# Altium PCB PCB1.PcbDoc (part 1 of 2)
Units mm, origin at the board's own origin, x right, y up, seen from the top; angles counter-clockwise.
Board outline 71.07 x 44.83 mm, 4 copper layers (Top Layer, Layer 1, Layer 2, Bottom Layer), stack 0.584 mm thick; 134 components, 68 nets, 384 pads, 224 vias.
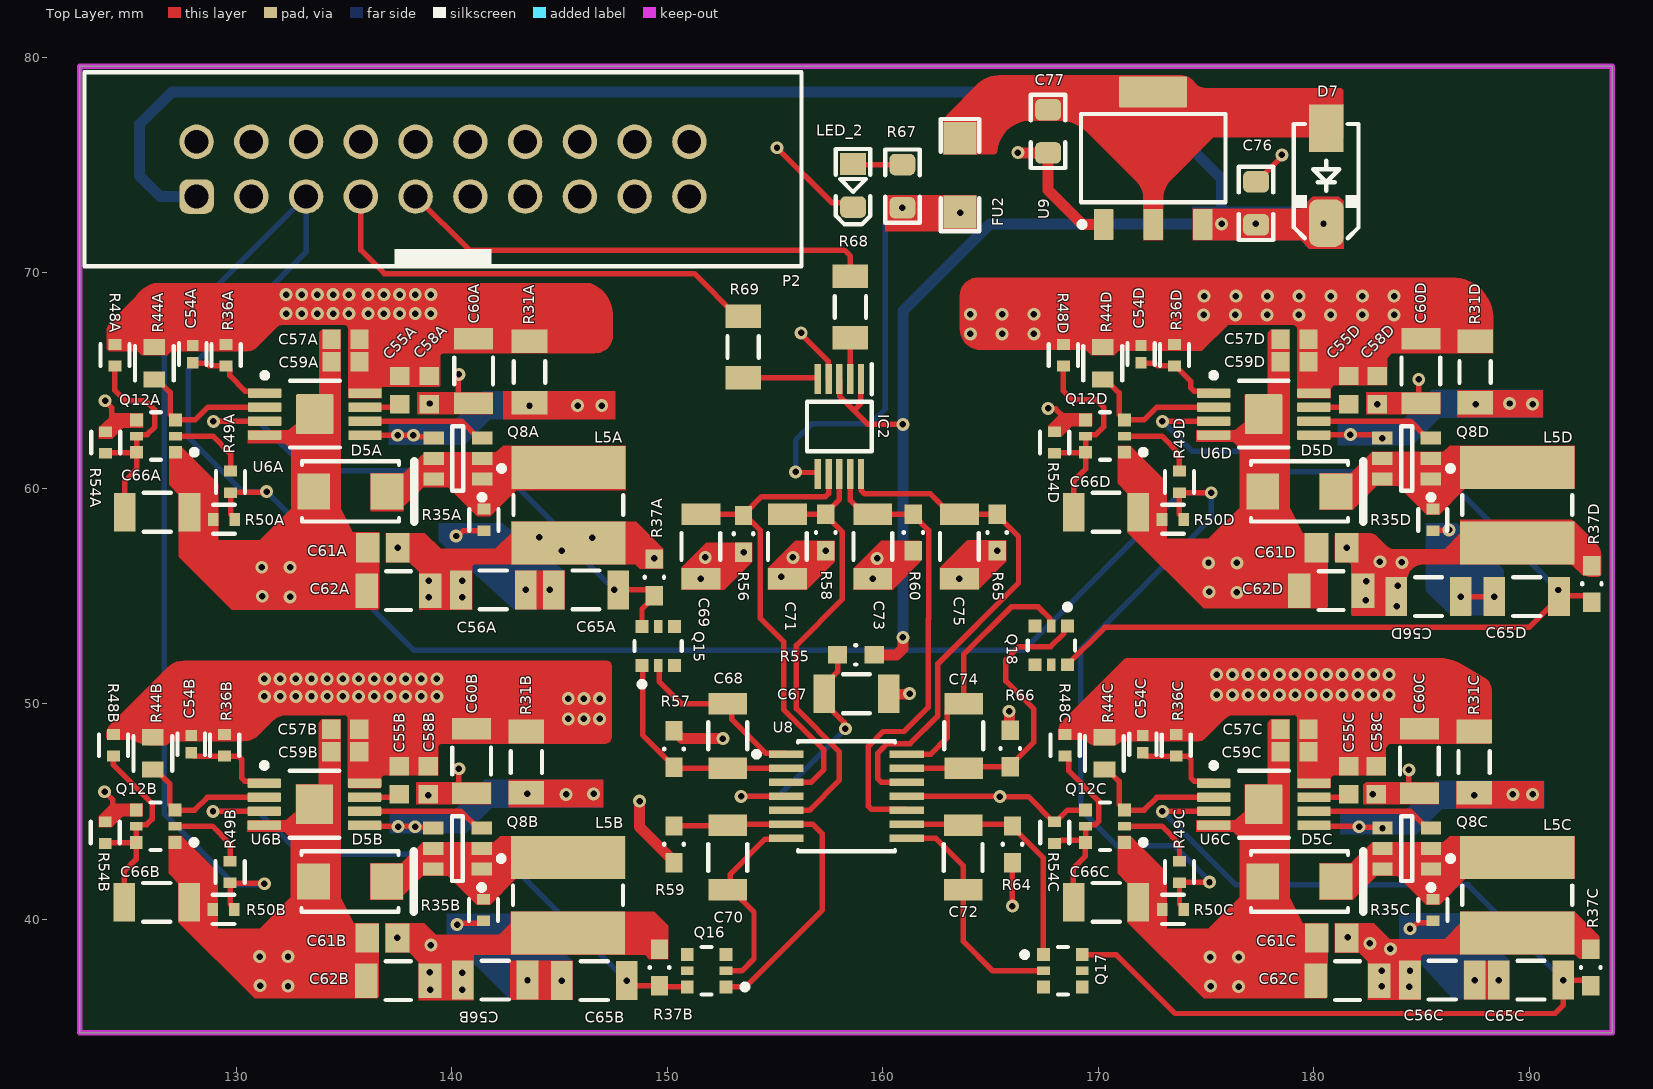
[diagram p0: Top Layer view]
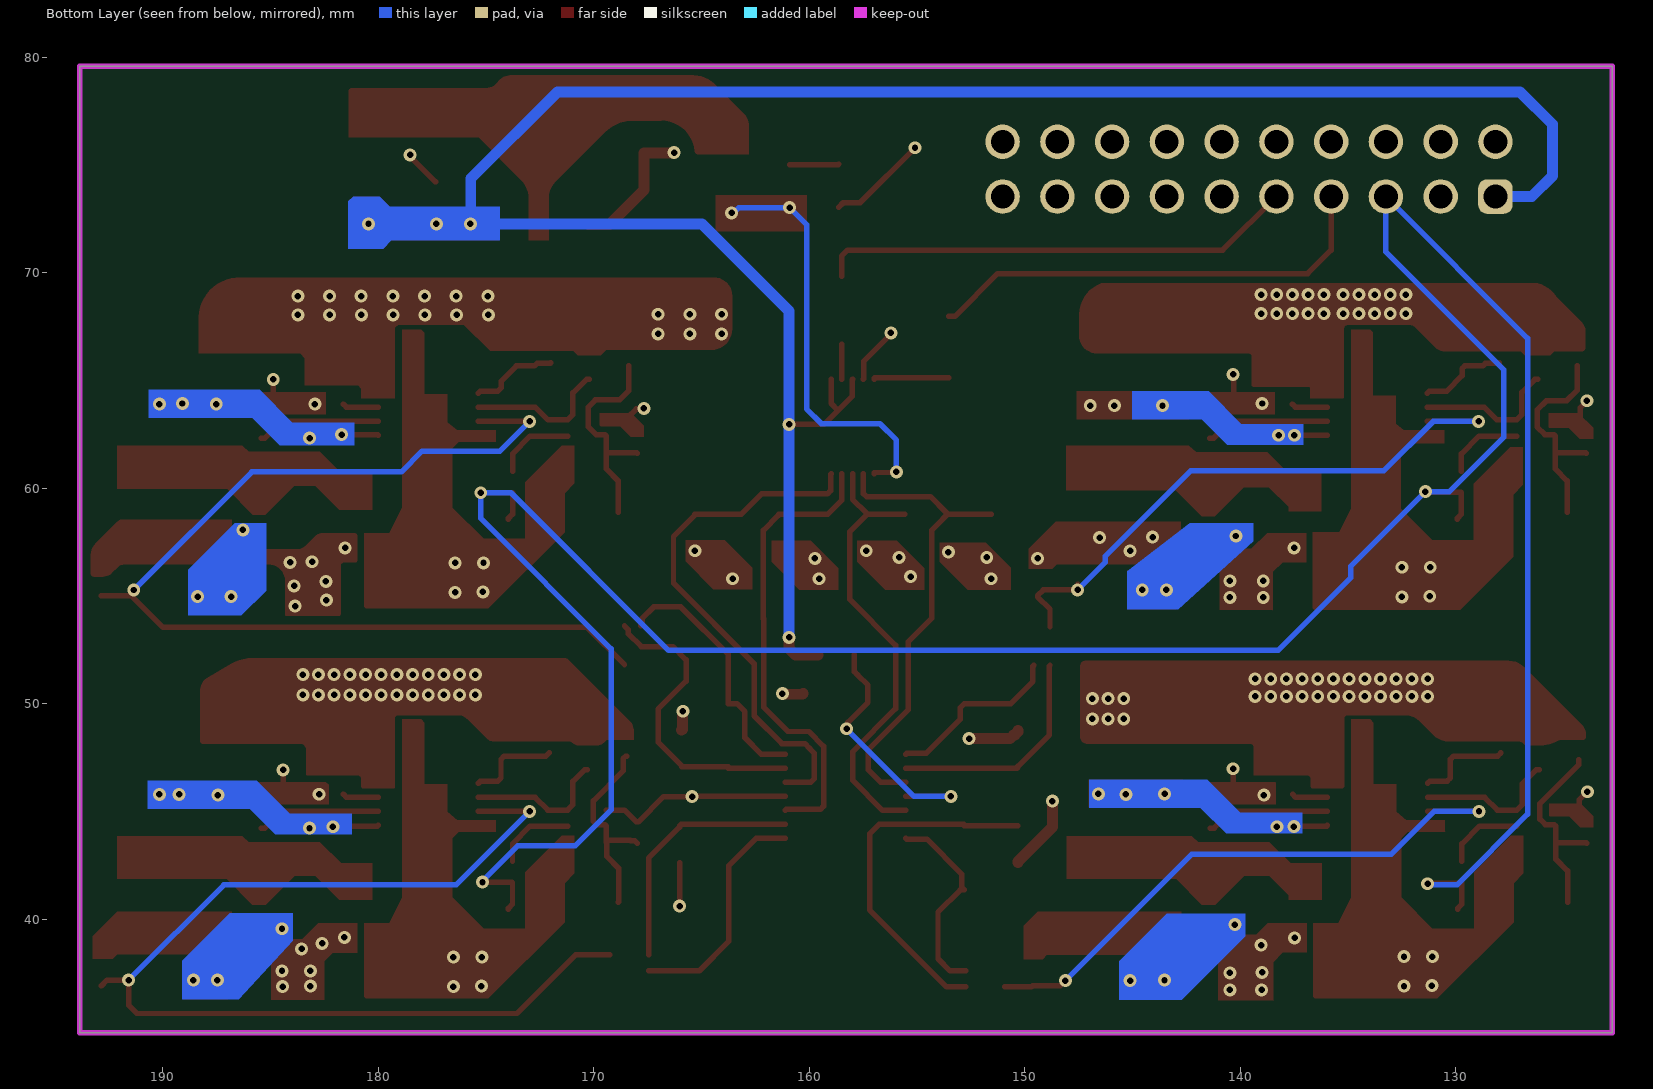
[diagram p1: Bottom Layer view, seen from below]
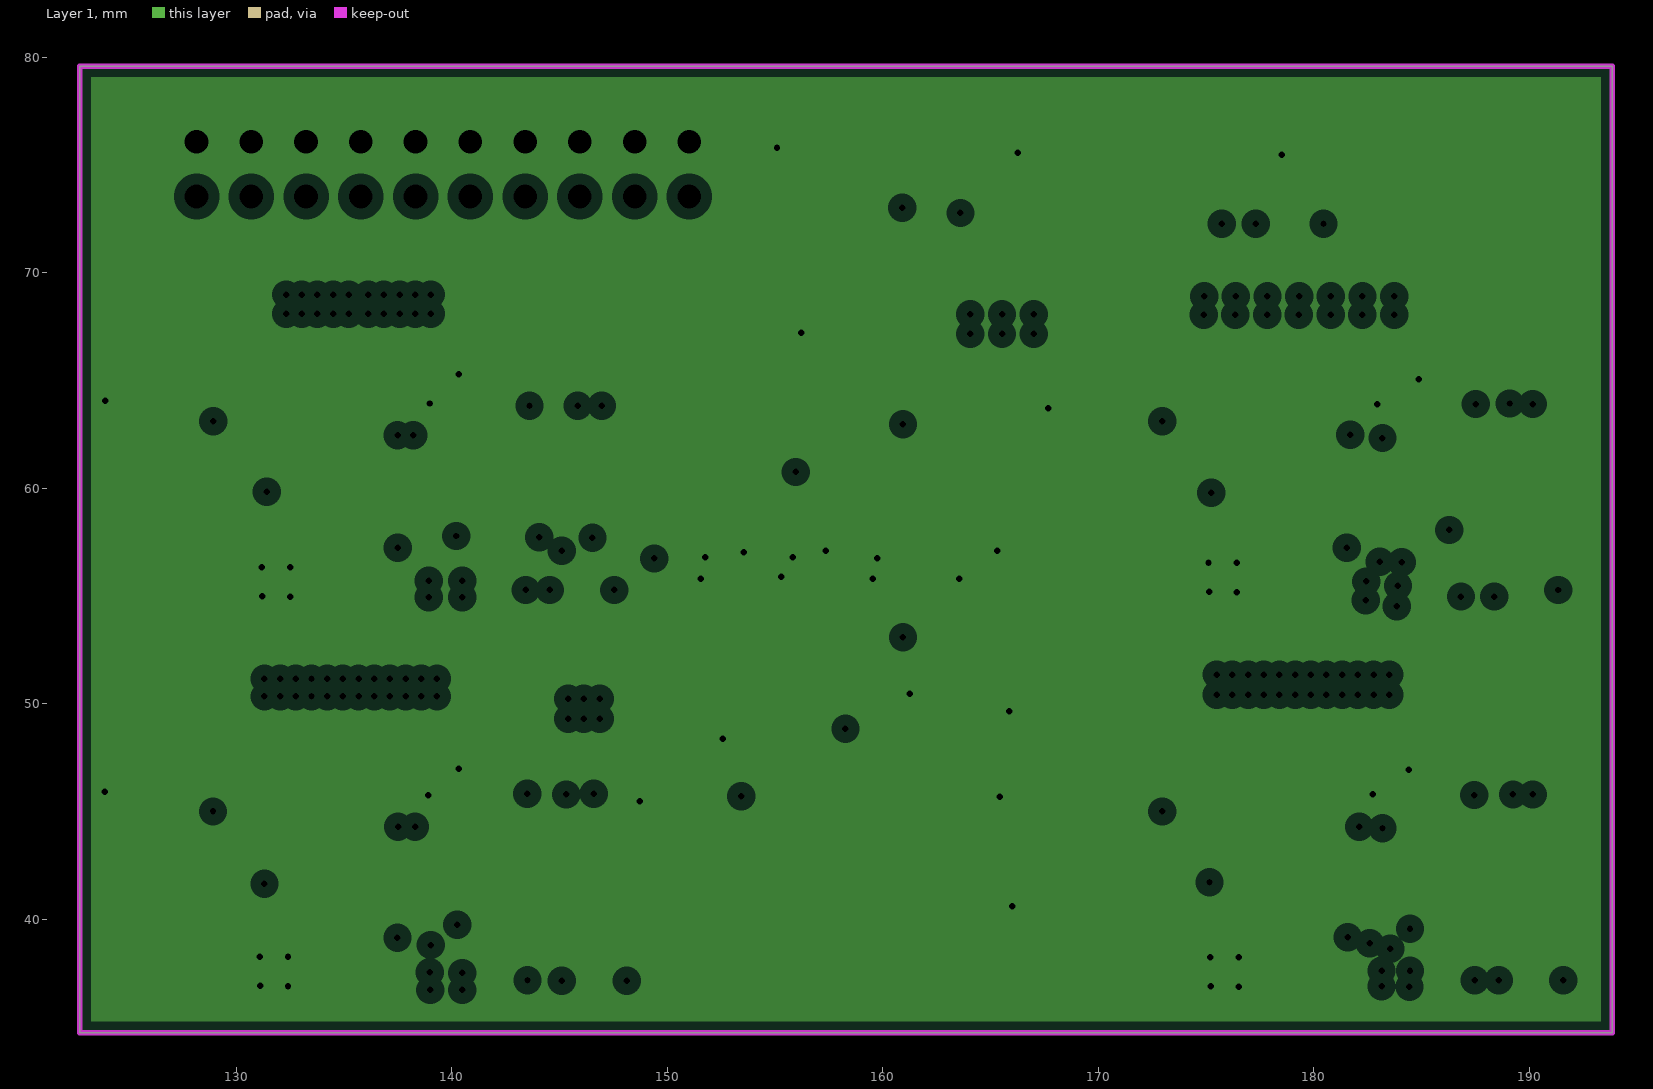
[diagram p2: Layer 1, clearances drawn from the general rule]
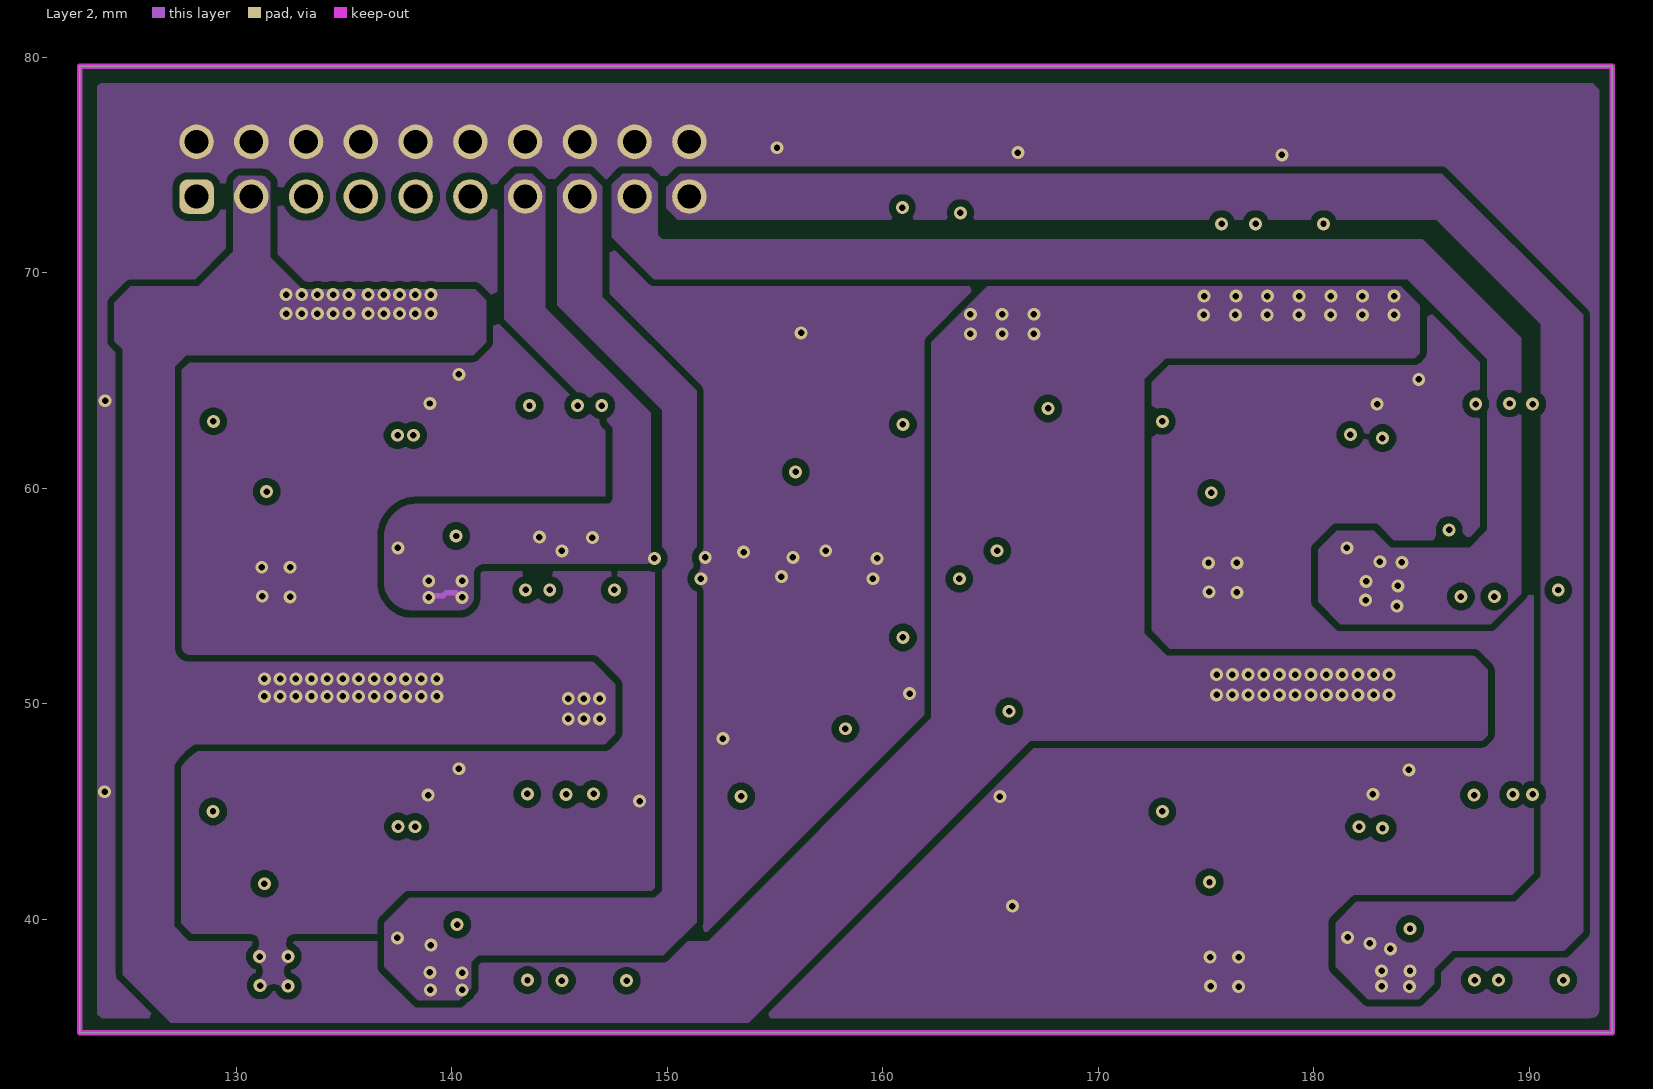
[diagram p3: Layer 2]
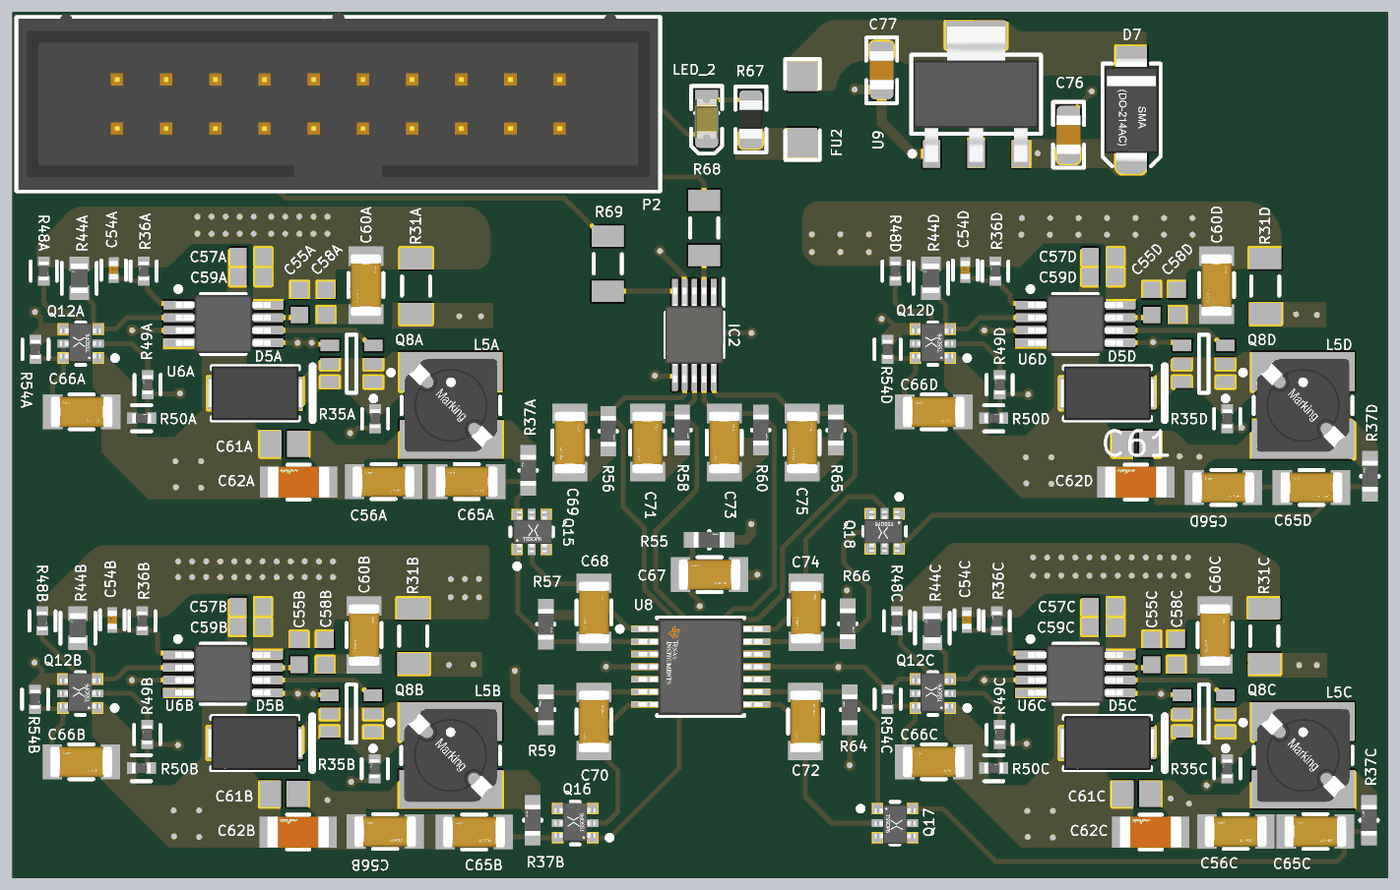
[diagram p5: 3D render of the assembled board from above, using the file's embedded part models]

## Layer stack, top to bottom
Top Solder: solder mask 0.0102, Solder Resist, Dk 3.5
Top Layer: signal copper 0.043
Dielectric 2: prepreg 0.0711, PP-006, Dk 4.1
Layer 1: plane copper 0.018, net GND
Dielectric 1: core 0.32, FR-4, Dk 4.8
Layer 2: signal copper 0.018
Dielectric 3: prepreg 0.0711, PP-006, Dk 4.1
Bottom Layer: signal copper 0.043
Bottom Solder: solder mask 0.0102, Solder Resist, Dk 3.5

## Board outline
122.758,34.747 122.758,79.578 193.827,79.578 193.827,34.747

## Design rules (kind name [scope] priority, off if disabled: settings)
AssemblyTestPointUsage [All] p1 off:
AssemblyTestpoint [All] p1 off: testpointundercomponent=FALSE minsize=1.016 maxsize=2.54 preferedsize=1.524 minholesize=0 maxholesize=1.016 preferedholesize=0.813 testpointgrid=0.025 usegrid=TRUE gridtolerance=0 allowsidetop=TRUE allowsidebottom=TRUE
Clearance Clearance_1 [All vs InPolygon] p1: gap=0.33 ignorepadtopadclearanceinfootprint=FALSE except(0: Arc-Hole Track-Hole SMDPad-Hole THPad-Hole Via-Hole Fill-Hole Poly-Hole Region-Hole Text-Hole)
Clearance [All] p2: gap=0.178 ignorepadtopadclearanceinfootprint=FALSE except(0: Arc-Hole Track-Hole SMDPad-Hole THPad-Hole Via-Hole Fill-Hole Poly-Hole Region-Hole Text-Hole)
ComponentClearance [All] p1 off: gap=0.254 collisioncheckmode=3 verticalgap=0.254 showdistances=FALSE
FabricationTestPointUsage [All] p1 off: valid=0 allowmultiple=FALSE
FabricationTestpoint [All] p1 off: side=3 testpointundercomponent=FALSE minsize=1.016 maxsize=2.54 preferedsize=1.524 minholesize=0 maxholesize=1.016 preferedholesize=0.813 testpointgrid=0.025 allowsidetop=TRUE allowsidebottom=TRUE usegrid=TRUE gridtolerance=0
Height [All] p1 off: minheight=0 maxheight=25.4 prefheight=12.7
HoleSize [All] p1 off: absolutevalues=TRUE maxlimit=2.54 minlimit=0.025 maxpercent=80.000 minpercent=20.000
HoleToHoleClearance [All] p1 off: gap=0.254 allowstackedmicrovias=TRUE
LayerPairs [All] p1 off: enforce=TRUE
MinimumSolderMaskSliver [All] p1 off: minsoldermaskwidth=0.254
NetAntennae [All] p1 off: netantennaetolerance=0
PasteMaskExpansion [All] p1 off: expansion=0
PlaneClearance [All] p1: clearance=0.508
PlaneConnect [All] p1: planeconnectstyle=Direct reliefexpansion=0.508 reliefentries=4 reliefconductorwidth=0.254 reliefairgap=0.254
PolygonConnect [All] p1: connectstyle=Direct reliefconductorwidth=0.254 reliefentries=4 polygonreliefangle="90 Angle" airgapwidth=0.254
RoutingVias [All] p1: holewidth=0.4 width=0.8 viastyle="Through Hole" minholewidth=0.3 minwidth=0.6 maxholewidth=0.711 maxwidth=1.27
SilkToSilkClearance [All] p1 off: silktosilkclearance=0.254
SilkToSolderMaskClearance [IsPad] p1 off: minsilkscreentomaskgap=0.254 clearancetoexposedcopper=TRUE
SolderMaskExpansion [All] p1 off: expansion=0.102 istentingtop=FALSE
Width [All] p1: maxlimit=2.54 minlimit=0.254 preferedwidth=0.254
14 further rules are at their usual default settings.

## Classes and differential pairs
channel class SWReg: SWReg1 SWReg2 SWReg3 SWReg4
net class Vout[4..1]: Vout1 Vout2 Vout3 Vout4
net class FB_in[4..1]: FB_in1 FB_in2 FB_in3 FB_in4
component class U_clusterPlusOpamp: C67 C68 C69 C70 C71 C72 C73 C74 C75 Q15 Q16 Q17 Q18 R55 R56 R57 R58 R59 R60 R64 R65 R66 U8
component class SWReg4: C54D C55D C56D C57D C58D C59D C60D C61D C62D C65D C66D D5D L5D Q8D Q12D R31D R35D R36D R37D R44D R48D R49D R50D R54D U6D
component class SWReg3: C54C C55C C56C C57C C58C C59C C60C C61C C62C C65C C66C D5C L5C Q8C Q12C R31C R35C R36C R37C R44C R48C R49C R50C R54C U6C
component class SWReg2: C54B C55B C56B C57B C58B C59B C60B C61B C62B C65B C66B D5B L5B Q8B Q12B R31B R35B R36B R37B R44B R48B R49B R50B R54B U6B
component class SWReg1: C54A C55A C56A C57A C58A C59A C60A C61A C62A C65A C66A D5A L5A Q8A Q12A R31A R35A R36A R37A R44A R48A R49A R50A R54A U6A
component class AdjRegSection: C76 C77 D7 FU2 IC2 LED_2 P2 R67 R68 R69 U9

## Components (designator, comment, footprint, x,y, rotation, side; value= is the part's Value field where it differs from the comment)
C54A "100pF" FP-C0402-BB-MFG 127.991,66.223 r90 top value="10 pF" (schematic designator C54)
C54B "100pF" FP-C0402-BB-MFG 127.921,48.127 r90 top value="10 pF" (schematic designator C54)
C54C "100pF" FP-C0402-BB-MFG 172.061,48.127 r90 top value="10 pF" (schematic designator C54)
C54D "100pF" FP-C0402-BB-MFG 171.983,66.223 r90 top value="10 pF" (schematic designator C54)
C55A "470nF" CAPC1608X90X35LL15T15 137.592,64.554 r90 top (schematic designator C55)
C55B "470nF" CAPC1608X90X35LL15T15 137.573,46.458 r90 top (schematic designator C55)
C55C "470nF" CAPC1608X90X35LL15T15 181.611,46.458 r90 top (schematic designator C55)
C55D "470nF" CAPC1608X90X35LL15T15 181.61,64.554 r90 top (schematic designator C55)
C56A "10nF" FP-CC1206-1_25-MFG 141.935,55.283 r0 top value="100 nF" (schematic designator C56)
C56B "10nF" FP-CC1206-1_25-MFG 142.018,37.187 r0 top value="100 nF" (schematic designator C56)
C56C "10nF" FP-CC1206-1_25-MFG 185.955,37.187 r0 top value="100 nF" (schematic designator C56)
C56D "10nF" FP-CC1206-1_25-MFG 185.318,54.978 r0 top value="100 nF" (schematic designator C56)
C57A "1uF" CAPC1608X90X35LL15T15 135.077,66.916 r0 top (schematic designator C57)
C57B "1uF" CAPC1608X90X35LL15T15 135.059,48.82 r0 top (schematic designator C57)
C57C "1uF" CAPC1608X90X35LL15T15 179.097,48.82 r0 top (schematic designator C57)
C57D "1uF" CAPC1608X90X35LL15T15 179.095,66.916 r0 top (schematic designator C57)
C58A "100nF" CAPC1608X90X35LL15T15 138.964,64.554 r90 top (schematic designator C58)
C58B "100nF" CAPC1608X90X35LL15T15 138.919,46.458 r90 top (schematic designator C58)
C58C "100nF" CAPC1608X90X35LL15T15 182.881,46.458 r90 top (schematic designator C58)
C58D "100nF" CAPC1608X90X35LL15T15 182.93,64.554 r90 top (schematic designator C58)
C59A "1uF" CAPC1608X90X35LL15T15 135.077,65.874 r0 top (schematic designator C59)
C59B "1uF" CAPC1608X90X35LL15T15 135.059,47.779 r0 top (schematic designator C59)
C59C "1uF" CAPC1608X90X35LL15T15 179.097,47.779 r0 top (schematic designator C59)
C59D "1uF" CAPC1608X90X35LL15T15 179.095,65.874 r0 top (schematic designator C59)
C60A "10uF" FP-CC1206-1_25-MFG 141.021,65.443 r270 top value="100 nF" (schematic designator C60)
C60B "10uF" FP-CC1206-1_25-MFG 140.926,47.347 r270 top value="100 nF" (schematic designator C60)
C60C "10uF" FP-CC1206-1_25-MFG 184.888,47.347 r270 top value="100 nF" (schematic designator C60)
C60D "10uF" FP-CC1206-1_25-MFG 184.962,65.443 r270 top value="100 nF" (schematic designator C60)
C61A "1uF" CAPC2013X140X50LL20T25 136.805,57.238 r0 top (schematic designator C61)
C61B "1uF" CAPC2013X140X50LL20T25 136.786,39.143 r0 top (schematic designator C61)
C61C "1uF" CAPC2013X140X50LL20T25 180.824,39.143 r0 top (schematic designator C61)
C61D "1uF" CAPC2013X140X50LL20T25 180.822,57.238 r0 top (schematic designator C61)
C62A "10uF" FP-GRM31C-0_2-e0_3_0_8-MFG 137.541,55.257 r180 top (schematic designator C62)
C62B "10uF" FP-GRM31C-0_2-e0_3_0_8-MFG 137.522,37.161 r180 top (schematic designator C62)
C62C "10uF" FP-GRM31C-0_2-e0_3_0_8-MFG 181.561,37.161 r180 top (schematic designator C62)
C62D "10uF" FP-GRM31C-0_2-e0_3_0_8-MFG 180.797,55.257 r180 top (schematic designator C62)
C65A "100nF" FP-CC1206-1_25-MFG 146.228,55.283 r0 top value="100 nF" (schematic designator C65)
C65B "100nF" FP-CC1206-1_25-MFG 146.616,37.161 r0 top value="100 nF" (schematic designator C65)
C65C "100nF" FP-CC1206-1_25-MFG 190.07,37.187 r0 top value="100 nF" (schematic designator C65)
C65D "100nF" FP-CC1206-1_25-MFG 189.865,54.978 r0 top value="100 nF" (schematic designator C65)
C66A "10uF" FP-CC1206-1_25-MFG 126.34,58.889 r0 top value="100 nF" (schematic designator C66)
C66B "10uF" FP-CC1206-1_25-MFG 126.321,40.794 r0 top value="100 nF" (schematic designator C66)
C66C "10uF" FP-CC1206-1_25-MFG 170.359,40.794 r0 top value="100 nF" (schematic designator C66)
C66D "10uF" FP-CC1206-1_25-MFG 170.357,58.889 r0 top value="100 nF" (schematic designator C66)
C67 "100nF" FP-CC1206-1_25-MFG 158.775,50.47 r0 top value="100 nF"
C68 "1nF" FP-CC1206-1_25-MFG 152.806,48.514 r270 top value="100 nF"
C69 "1uF" FP-CC1206-1_25-MFG 151.562,57.302 r270 top value="100 nF"
C70 "1nF" FP-CC1206-1_25-MFG 152.806,42.875 r90 top value="100 nF"
C71 "1uF" FP-CC1206-1_25-MFG 155.575,57.302 r270 top value="100 nF"
C72 "1nF" FP-CC1206-1_25-MFG 163.728,42.875 r90 top value="100 nF"
C73 "1uF" FP-CC1206-1_25-MFG 159.537,57.302 r270 top value="100 nF"
C74 "1nF" FP-CC1206-1_25-MFG 163.754,48.514 r270 top value="100 nF"
C75 "1uF" FP-CC1206-1_25-MFG 163.551,57.302 r270 top value="100 nF"
C76 "Cap_El" 0805C 177.317,73.219 r90 top value=10uF
C77 "Cap_El" 0805C 167.665,76.556 r270 top value=10uF
D5A "VS-10MQ060NTRPBF" VISH-DO-214AC_V 135.308,59.855 r0 top (schematic designator D5)
D5B "VS-10MQ060NTRPBF" VISH-DO-214AC_V 135.289,41.759 r0 top (schematic designator D5)
D5C "VS-10MQ060NTRPBF" VISH-DO-214AC_V 179.327,41.759 r0 top (schematic designator D5)
D5D "VS-10MQ060NTRPBF" VISH-DO-214AC_V 179.325,59.855 r0 top (schematic designator D5)
D7 "1N4007" 430X270D 180.569,74.498 r270 top
FU2 "Fuse Thermal" 1206 163.576,74.524 r270 top
IC2 "MAX5841LEUB+" SOP50P490X110-10N 157.988,62.865 r270 top
L5A "74408943101" WE-SPC_4838 145.415,59.22 r0 top (schematic designator L5)
L5B "74408943101" WE-SPC_4838 145.396,41.124 r0 top (schematic designator L5)
L5C "74408943101" WE-SPC_4838 189.435,41.124 r0 top (schematic designator L5)
L5D "74408943101" WE-SPC_4838 189.433,59.22 r0 top (schematic designator L5)
LED_2 "power" 0805LED 158.623,74.041 r270 top
P2 "61202021621" 61202021621 139.598,74.803 r0 top
Q8A "NTGS5120PT1G" ONSC-TSOP-6-318G-02_V 140.284,61.379 r180 top (schematic designator Q8)
Q8B "NTGS5120PT1G" ONSC-TSOP-6-318G-02_V 140.266,43.283 r180 top (schematic designator Q8)
Q8C "NTGS5120PT1G" ONSC-TSOP-6-318G-02_V 184.304,43.283 r180 top (schematic designator Q8)
Q8D "NTGS5120PT1G" ONSC-TSOP-6-318G-02_V 184.302,61.379 r180 top (schematic designator Q8)
Q12A "BC846S,115" FP-SOT363-MFG 126.289,62.42 r180 top (schematic designator Q12)
Q12B "BC846S,115" FP-SOT363-MFG 126.27,44.324 r180 top (schematic designator Q12)
Q12C "BC846S,115" FP-SOT363-MFG 170.308,44.324 r180 top (schematic designator Q12)
Q12D "BC846S,115" FP-SOT363-MFG 170.307,62.42 r180 top (schematic designator Q12)
Q15 "BC846S,115" FP-SOT363-MFG 149.581,52.68 r90 top
Q16 "BC846S,115" FP-SOT363-MFG 151.83,37.617 r180 top
Q17 "BC846S,115" FP-SOT363-MFG 168.351,37.617 r0 top
Q18 "BC846S,115" FP-SOT363-MFG 167.818,52.715 r270 top
R31A "0R47" RESC3216X70X50NL05T20 143.612,65.392 r270 top (schematic designator R31)
R31B "0R47" RESC3216X70X50NL05T20 143.466,47.296 r270 top (schematic designator R31)
R31C "0R47" RESC3216X70X50NL05T20 187.428,47.296 r270 top (schematic designator R31)
R31D "0R47" RESC3216X70X50NL05T20 187.477,65.392 r270 top (schematic designator R31)
R35A "22K" FP-RC0402-0_4-MFG 141.497,58.533 r90 top (schematic designator R35)
R35B "22K" FP-RC0402-0_4-MFG 141.478,40.437 r90 top (schematic designator R35)
R35C "22K" FP-RC0402-0_4-MFG 185.516,40.437 r90 top (schematic designator R35)
R35D "22K" FP-RC0402-0_4-MFG 185.514,58.533 r90 top (schematic designator R35)
R36A "6K8R" FP-RC0402-0_4-MFG 129.54,66.173 r90 top (schematic designator R36)
R36B "6K8R" FP-RC0402-0_4-MFG 129.471,48.077 r90 top (schematic designator R36)
R36C "6K8R" FP-RC0402-0_4-MFG 173.61,48.077 r90 top (schematic designator R36)
R36D "6K8R" FP-RC0402-0_4-MFG 173.532,66.173 r90 top (schematic designator R36)
R37A "33K" FP-RC0603-0_55-MFG 149.403,55.867 r90 top (schematic designator R37)
R37B "33K" FP-RC0603-0_55-MFG 149.638,37.771 r90 top (schematic designator R37)
R37C "33K" FP-RC0603-0_55-MFG 192.838,37.771 r90 top (schematic designator R37)
R37D "33K" FP-RC0603-0_55-MFG 192.887,55.562 r90 top (schematic designator R37)
R44A "240K" FP-CRCW0603-e3-MFG 126.213,65.798 r90 top (schematic designator R44)
R44B "240K" FP-CRCW0603-e3-MFG 126.143,47.702 r90 top (schematic designator R44)
R44C "240K" FP-CRCW0603-e3-MFG 170.283,47.702 r90 top (schematic designator R44)
R44D "240K" FP-CRCW0603-e3-MFG 170.205,65.798 r90 top (schematic designator R44)
R48A "100KR" FP-RC0402-0_4-MFG 124.384,66.173 r270 top (schematic designator R48)
R48B "100KR" FP-RC0402-0_4-MFG 124.314,48.077 r270 top (schematic designator R48)
R48C "100KR" FP-RC0402-0_4-MFG 168.454,48.077 r270 top (schematic designator R48)
R48D "100KR" FP-RC0402-0_4-MFG 168.376,66.173 r270 top (schematic designator R48)
R49A "4K7R" FP-RC0402-0_4-MFG 129.743,60.294 r90 top (schematic designator R49)
R49B "4K7R" FP-RC0402-0_4-MFG 129.725,42.199 r90 top (schematic designator R49)
R49C "4K7R" FP-RC0402-0_4-MFG 173.763,42.199 r90 top (schematic designator R49)
R49D "4K7R" FP-RC0402-0_4-MFG 173.761,60.294 r90 top (schematic designator R49)
R50A "2k2R" FP-RC0402-0_4-MFG 129.439,58.559 r0 top (schematic designator R50)
R50B "2k2R" FP-RC0402-0_4-MFG 129.42,40.463 r0 top (schematic designator R50)
R50C "2k2R" FP-RC0402-0_4-MFG 173.458,40.463 r0 top (schematic designator R50)
R50D "2k2R" FP-RC0402-0_4-MFG 173.456,58.559 r0 top (schematic designator R50)
R54A "10KR" FP-RC0402-0_4-MFG 123.952,62.123 r270 top (schematic designator R54)
R54B "10KR" FP-RC0402-0_4-MFG 123.933,44.027 r270 top (schematic designator R54)
R54C "10KR" FP-RC0402-0_4-MFG 167.972,44.027 r270 top (schematic designator R54)
R54D "10KR" FP-RC0402-0_4-MFG 167.97,62.123 r270 top (schematic designator R54)
R55 "33R" FP-RC0603-0_55-MFG 158.75,52.273 r0 top
R56 "33R" FP-RC0603-0_55-MFG 153.543,57.887 r270 top
R57 "1KR" FP-RC0603-0_55-MFG 150.317,47.904 r270 top
R58 "33R" FP-RC0603-0_55-MFG 157.353,57.95 r270 top
R59 "1KR" FP-RC0603-0_55-MFG 150.317,43.485 r90 top
R60 "33R" FP-RC0603-0_55-MFG 161.417,57.95 r270 top
R64 "1KR" FP-RC0603-0_55-MFG 166.014,43.485 r90 top
R65 "33R" FP-RC0603-0_55-MFG 165.303,57.95 r270 top
R66 "1KR" FP-RC0603-0_55-MFG 165.913,47.93 r270 top
R67 "Res1" 0805L 160.909,74.016 r90 top value=330
R68 "330" RESC3216X70X50NL05T20 158.496,68.405 r90 top
R69 "330" RESC3216X70X50NL05T20 153.518,66.548 r90 top
U6A "LM25085AMY/NOPB" DGN0008A_M 133.655,63.437 r0 top (schematic designator U6)
U6B "LM25085AMY/NOPB" DGN0008A_M 133.636,45.342 r0 top (schematic designator U6)
U6C "LM25085AMY/NOPB" DGN0008A_M 177.674,45.342 r0 top (schematic designator U6)
U6D "LM25085AMY/NOPB" DGN0008A_M 177.673,63.437 r0 top (schematic designator U6)
U8 "LM324PWR" FP-PW0014A-MFG 158.312,45.71 r0 top
U9 "LM1117MPX-3.3/NOPB" DCY0004A_L 172.542,75.311 r90 top

## Footprints (in the part's own frame and the unit in brackets; to place one, negate y for a bottom-side part, rotate by r counter-clockwise, add the part's x,y. Pads: shape width x height; smd on the part's side, far side on the other; paste and mask are expansions set on the pad)
430X270D [mm] "SMA Molded Diode, 2-Leads, Body 4.3x2.7mm"
  rect 2.2x1.6 smd: 1(-2.2,0)
  rrect50% 2.2x1.6 smd: 2(2.2,0)
  silkscreen extent -2.4,-1.5 2.9,1.5, body extent -2.75,-1.4 2.75,1.4, height 2.6
0805C [mm] ",0805, 2012, 200X130"
  rrect50% 1x1.2 smd mask+0.075: 1(-1,0) 2(1,0)
  Top Layer pour cut-out: -0.5,0.8 0.5,0.8 0.5,-0.8 -0.5,-0.8
  silkscreen extent -1.7,-0.8 1.7,0.8, body extent -1,-0.62 1,0.63, height 1
0805L [mm] ",0805, 2012, 200X130"
  rrect50% 1x1.2 smd mask+0.075: 1(-1,0) 2(1,0)
  Top Layer pour cut-out: -0.5,0.8 0.5,0.8 0.5,-0.8 -0.5,-0.8
  silkscreen extent -1.7,-0.8 1.7,0.8, body extent -1,-0.6 1,0.6, height 0.95
0805LED [mm] "0805LED"
  rect 1x1.2 smd mask+0.075: 1(-1,0)
  rrect50% 1x1.2 smd mask+0.075: 2(1,0)
  Top Layer pour cut-out: -0.5,0.8 0.5,0.8 0.5,-0.8 -0.5,-0.8
  silkscreen extent -1.7,-0.8 1.8,0.8, body extent -1.01,-0.62 1.01,0.63, height 1.1
1206 [mil]
  rect 60x60 smd: 1(-67.5,0) 2(67.5,0)
  silkscreen extent -102,-35 102,35
61202021621 [mm] "20 pins, straight, gold plating"
  rrect50% 1.6x1.6 hole 1.1: 1(-11.43,-1.27)
  round 1.6 hole 1.1: 2(-11.43,1.27) 3(-8.89,-1.27) 4(-8.89,1.27) 5(-6.35,-1.27) 6(-6.35,1.27) 7(-3.81,-1.27) 8(-3.81,1.27) 9(-1.27,-1.27) 10(-1.27,1.27) 11(1.27,-1.27) 12(1.27,1.27) 13(3.81,-1.27) 14(3.81,1.27) 15(6.35,-1.27) 16(6.35,1.27) 17(8.89,-1.27) 18(8.89,1.27) 19(11.43,-1.27) 20(11.43,1.27)
  silkscreen extent -16.63,-4.5 16.63,4.5, body extent -16.53,-4.42 16.53,4.75, height 9.13
CAPC1608X90X35LL15T15 [mm] "Chip Capacitor, 2-Leads, Body 1.60x0.81mm, IPC High Density"
  rect 0.85x0.9 smd: 1(-0.65,0) 2(0.65,0)
  body extent -0.88,-0.48 0.87,0.48, height 0.9
CAPC2013X140X50LL20T25 [mm] "Chip Capacitor, 2-Leads, Body 2.00x1.25mm, IPC High Density"
  rect 1.1x1.35 smd: 1(-0.7,0) 2(0.7,0)
  body extent -1.1,-0.72 1.1,0.72, height 1.4
DCY0004A_L [mm] "SOT223, 4-Leads, Body 6.7x3.7mm, Pitch 2.3mm, IPC High Density"
  rrect11% 1.45x0.9 smd: 1(-3.075,2.3) 2(-3.075,0) 3(-3.075,-2.3)
  rrect7% 1.45x3.15 smd: 4(3.075,0)
  silkscreen extent -3.2,-3.35 2.05,3.42, body extent -3.5,-3.25 3.5,3.25, height 1.62
DGN0008A_M [mm] "TSOP, 8-Leads, Body 3.1x3.1mm, Pitch 0.65mm, Thermal Pad 1.85x1.73mm, IPC Low Density"
  rrect22% 1.55x0.45 smd: 1(-2.325,0.975) 2(-2.325,0.325) 3(-2.325,-0.325) 4(-2.325,-0.975) 5(2.325,-0.975) 6(2.325,-0.325) 7(2.325,0.325) 8(2.325,0.975)
  rrect6% 1.73x1.85 smd: 9(0,0)
  silkscreen extent -2.45,-1.55 1.15,1.92, body extent -2.45,-1.5 2.45,1.5, height 0.94
FP-C0402-BB-MFG [mm]
  rect 0.52x0.52 smd paste+0 mask+0: 1(-0.4,0) 2(0.4,0)
  silkscreen extent -0.5,-0.64 0.5,0.64, body extent -0.8,-0.4 0.8,0.4, height 0.25
FP-CC1206-1_25-MFG [mm]
  rect 1x1.8 smd paste+0 mask+0: 1(-1.5,0) 2(1.5,0)
  silkscreen extent -0.63,-0.9 0.63,0.9, body extent -2.2,-1.25 2.2,1.25, height 0.25
FP-CRCW0603-e3-MFG [mm]
  rect 0.75x1 smd paste+0 mask+0: 1(-0.75,0) 2(0.75,0)
  silkscreen extent -0.8,-0.9 0.8,0.9, body extent -1.22,-0.6 1.22,0.6, height 0.25
FP-GRM31C-0_2-e0_3_0_8-MFG [mm]
  rect 1.05x1.6 smd paste+0 mask+0: 1(-1.475,0) 2(1.475,0)
  silkscreen extent -0.58,-0.9 0.58,0.9, body extent -2.1,-1 2.1,1, height 0.25
FP-PW0014A-MFG [mm]
  rect 1.6x0.35 smd paste-1000 mask+0: 1(-2.8,1.95) 2(-2.8,1.3) 3(-2.8,0.65) 4(-2.8,0) 5(-2.8,-0.65) 6(-2.8,-1.3) 7(-2.8,-1.95) 8(2.8,-1.95) 9(2.8,-1.3) 10(2.8,-0.65) 11(2.8,0) 12(2.8,0.65) 13(2.8,1.3) 14(2.8,1.95)
  silkscreen extent -4.3,-2.55 2.25,2.55, body extent -3.7,-2.8 3.7,2.8, height 0.25
FP-RC0402-0_4-MFG [mm]
  rect 0.5x0.6 smd paste+0 mask+0: 1(-0.5,0) 2(0.5,0)
  silkscreen extent -0.5,-0.67 0.5,0.67, body extent -0.85,-0.4 0.85,0.4, height 0.25
FP-RC0603-0_55-MFG [mm]
  rect 0.9x0.8 smd paste+0 mask+0: 1(-0.85,0) 2(0.85,0)
  silkscreen extent -0.03,-0.45 0.03,0.45, body extent -1.4,-0.55 1.4,0.55, height 0.25
FP-SOT363-MFG [mm]
  rect 0.6x0.6 smd paste-1000 mask+0: 1(-0.9,0.75) 3(-0.9,-0.75) 4(0.9,-0.75) 6(0.9,0.75)
  rect 0.6x0.4 smd paste+0 mask+0: 2(-0.9,0) 5(0.9,0)
  silkscreen extent -1.9,-1.1 0.23,1.1, body extent -1.33,-1.2 1.33,1.2, height 0.25
ONSC-TSOP-6-318G-02_V [mm] "SOP, 6-Leads, Body 3x1.5mm, Pitch 0.95mm"
  rect 0.95x0.6 smd: 1(-1.125,0.95) 2(-1.125,0) 3(-1.125,-0.95) 4(1.125,-0.95) 5(1.125,0) 6(1.125,0.95)
  silkscreen extent -1.25,-1.5 0.25,1.92, body extent -0.75,-1.5 0.75,1.5, height 1.1
RESC3216X70X50NL05T20 [mm] "Chip Resistor, 2-Leads, Body 3.20x1.60mm, IPC Medium Density"
  rect 1.1x1.65 smd: 1(-1.425,0) 2(1.425,0)
  silkscreen extent -0.5,-0.72 0.5,0.72, body extent -1.63,-0.82 1.62,0.82, height 0.7
SOP50P490X110-10N [mm]
  rect 1.4x0.3 smd: 1(-2.2,1) 2(-2.2,0.5) 3(-2.2,0) 4(-2.2,-0.5) 5(-2.2,-1) 6(2.2,-1) 7(2.2,-0.5) 8(2.2,0) 9(2.2,0.5) 10(2.2,1)
  silkscreen extent -2.9,-1.5 1.15,1.5, body extent -2.45,-1.5 2.45,1.5, height 1.1
VISH-DO-214AC_V [mm] "Molded Diode, 2-Leads, Body 4.5x2.79mm"
  rect 1.52x1.68 smd: 1(-1.7,0) 2(1.7,0)
  silkscreen extent -2.25,-1.4 2.96,1.4, body extent -2.47,-1.4 2.47,1.4, height 2.29
WE-SPC_4838 [mm] "SMD Shielded Power Inductor, body 4.8x4.8mm"
  rect 5.3x2 smd: 1(0,1.75) 2(0,-1.75)
  silkscreen extent -3.22,-0.45 2.55,1.82, body extent -2.41,-2.41 2.41,2.41, height 3.8

## Part data
C54A C54B C54C C54D: library part CMP-1034-00716-4, "CAP CER 10PF 25V 5% NP0 0402", Capacitance="10 pF", Manufacturer=Kemet, Manufacturer Part Number=C0402C100J3GACTU, Package=C0402-BB, Temperature="-55°C to +125°C", Temperature Characteristic=C0G, Temperature Coefficient=15%, Temperature Range High=+125°C, Temperature Range Low=-55°C, Tolerance=0.05, Voltage Rating="25 V", Automotive=No, Category=Cap, ComponentLink2Description=Datasheet, ComponentLink2URL=https://content.kemet.com/datasheets/KEM_C1002_X7R_SMD.pdf, Device Class L1="Passive Components", Device Class L2=Capacitors, Device Class L3="Ceramic Capacitors", Digikey Description="CAP CER 10PF 25V 5% NP0 0402", Height=0.55mm, Ipc Land Pattern Name=CAPC10050X50, Lead Free=Yes, Material=Ceramic, Mouser Description="Multilayer Ceramic Capacitors MLCC - SMD/SMT 25volts 10pF C0G 5%", Octopart=https://octopart.com/c0402c100j3gactu-kemet-9138549, RoHS=TRUE
C55A C55B C55C C55D C57A C57B C57C C57D C58A C58B C58C C58D C59A C59B C59C C59D: library part CMP-2006-02298-2, Manufacturer=Kemet, Part Number=C0603C105K4RACTU
C56A C56B C56C C56D C60A C60B C60C C60D C65A C65B C65C C65D C66A C66B C66C C66D C67 C68 C69 C70 C71 C72 C73 C74 C75: library part CMP-03422-000842-1, "CAP CER 0.1UF 50V X7R 1206", Capacitance="100 nF", Manufacturer=Yageo, Manufacturer Part Number=CC1206KRX7R9BB104, Package=CC1206-1.25, Temperature="-55°C to +125°C", Temperature Characteristic=X7R, Temperature Coefficient=15%, Temperature Range High=+125°C, Temperature Range Low=-55°C, Tolerance=0.1, Voltage Rating="50 V", Automotive=No, Automotive Grade=NA, Category=Cap, ComponentLink2Description=Datasheet, ComponentLink2URL=http://www.yageo.com/documents/recent/UPY-NP0X7R_HV_1KV-to-3KV_11.pdf, Device Class L1="Passive Components", Device Class L2=Capacitors, Device Class L3="Ceramic Capacitors", Digikey Description="CAP CER 0.1UF 50V X7R 1206", Footprint Url=http://www.yageo.com/exep/pages/download/literatures/UPY-C_GEN_24.pdf, Height=1.45mm, Lead Free=Yes, Material=Ceramic, Mouser Description="Multilayer Ceramic Capacitors MLCC - SMD/SMT 100nF 50V X7R 10%", Octopart=https://octopart.com/cc1206krx7r9bb104-yageo-39467816, RoHS=TRUE
C61A C61B C61C C61D: library part CMP-2007-03234-1, Manufacturer=Kemet, Part Number=C0805C105K3RACTU
C62A C62B C62C C62D: library part CMP-06035-003589-1, "Chip Multilayer Ceramic Capacitors for General Purpose, 1206, 10uF, X7R, 15%, 10%, 25V", Case Code (Imperial)=1206, Case Code (Metric)=3216, Dielectric=X7R, Max Operating Temperature=125°C, Min Operating Temperature=-55°C, Package Quantity=1, Tolerance=10%, Voltage=25V, Capacitance=10uF, Case/Package=1206, Depth=1.6mm, Height=1.6mm, Lead Free="Lead Free", Length=3.2mm, Material=Ceramic, Mount="Surface Mount", Number of Pins=2, Packaging="Tape and Reel", Radiation Hardening=No, REACH SVHC="No SVHC", Termination=SMD/SMT, Thickness=0.071inch, Voltage Rating=25V, Voltage Rating (DC)=25V, Width=1.6mm
C76 C77: "Capacitor", PackageReference=CAPR5-4X5, Published=23-Sep-2002, Publisher="Altium Limited"
D5A D5B D5C D5D: library part CMP-2000-07404-1, "High Performance Schottky Rectifier, 60 V, 1 A, -55 to 150 degC, 2-Pin DO-214AC (SMA), RoHS, Tape and Reel", Current - Average Rectified (Io)=2.1A, Current - Reverse Leakage @ Vr=500µA@60V, Junction Operating Temp=-55°C~150°C, Manufacturer=Vishay, Package / Case=DO-214AC,SMA, Package Description="2-Pin Surface Mount Device, Body 4.245 x 2.665 mm", Package Reference="DO-214AC (SMA)", Standard Package=7,500, Supplier Device Package=DO-214AC(SMA), Thermal Resistance=80°C/WJa, Voltage - DC Reverse (Vr) (Max)=60V, Voltage - Forward (Vf) (Max) @ If=710mV@1.5A, Catalog Drawings="SMASeriesTop /  / SMASeriesSide", Category=DiscreteSemiconductorProducts, Datasheet URL=http://www.vishay.com/docs/94118/vs-10mq060npbf.pdf, Datasheet Version=02/2015, Diode Type=Schottky, Dynamic Catalog=SchottkyDiode, Family=Diodes,Rectifiers-Single, Manufacturer URL=http://www.vishay.com/, Minimum Quantity=Schottky, Mounting Technology=SurfaceMount, Mounting Type=SurfaceMount, Operating Temperature - Junction=-55°C~150°C, Other Names="10MQ060NPBFTR / 10MQ060NTRPBF / VS-10MQ060NPBFTR / VS-10MQ060NPBFTR-ND / VS10MQ060NPBFTR-ND / VS10MQ060NTRPBF", Packaging=Tape&Reel(TR), Quantity Available=Tape&Reel(TR)AlternatePackaging, Speed="FastRecovery= / 200mA(Io)"
D7: library part Diode, "1 Amp General Purpose Rectifier", Package Information="Latest Revision: Aug-1999", Package Reference=DO-41, Code - JEDEC=DO-204-AL, Datasheet="Latest Revision: 1998", Published=8-Jun-2000, Publisher="Altium Limited", Revision 1="11-Jul-2000: SIM Model Added.", Revision 2="17-Jul-2002: Re-released for DXP Platform."
FU2: "Thermal Fuse", LatestRevisionDate=17-Jul-2002, LatestRevisionNote="Re-released for DXP Platform.", PackageDescription="Thru-Hole; 2 Leads", PackageReference=PIN-W2/E2.8, Published=24-Mar-1999, Publisher="Altium Limited"
IC2: "Integrated Circuit", Manufacturer_Name="Analog Devices", Mouser Part Number=700-MAX5841LEUB, Datasheet Link=https://datasheets.maximintegrated.com/en/ds/MAX5841.pdf, Height=1.1mm, Manufacturer_Part_Number=MAX5841LEUB+, Mouser Price/Stock=https://www.mouser.co.uk/ProductDetail/Maxim-Integrated/MAX5841LEUB%2b?qs=9Cj2FLRihcMjPr0cjsKN4w%3D%3D
L5A L5B L5C L5D: library part CMP-1418-00004-2, Ambient Temperature Range High=85°C, Ambient Temperature Range Low=-40°C, Case/Package=Nonstandard, Current Rating=520mA, DC Resistance (DCR)=770mΩ, Inductance=100µH, Inductance Tolerance=20%, Max Operating Temperature=125°C, Saturation Current=680mA, Self Resonant Frequency=7.8MHz, Test Frequency=100kHz, Composition=Wirewound, Core Material=Ferrite, Depth=4.8mm, Height=3.8mm, Height - Seated (Max)=4.0894mm, Lead Free="Lead Free", Length=4.8mm, Max DC Current=520mA, Min Operating Temperature=-40°C, Mount="Surface Mount", NexarPartId=22866605, Number of Pins=2, Packaging="Cut Tape (CT)", REACH SVHC=Unknown, RMS Current (Irms)=520mA, RoHS=Compliant, Shielding=Shielded, Termination=SMD/SMT, Tolerance=20%, Width=4.8mm
LED_2: library part LED3, "Typical BLUE SiC LED", PackageDocument=16-Apr-2002, DatasheetDocument=16-Apr-2002, LatestRevisionDate=17-Dec-2003, LatestRevisionNote="PCB Footprint replaced.", PackageReference=3.5X2.8X1.9, Published=8-Jun-2000, Publisher="Altium Limited"
P2: library part CMP-1502-00010-2, Color=Black, Contact Resistance=20mΩ, Current Rating=3A, Flammability Rating="UL94 V-0", Insulation Resistance=1GΩ, Max Operating Temperature=105°C, Min Operating Temperature=-40°C, Operating Supply Voltage=250V, Connector Type="Male Pin", Contact Gender=Male, Contact Material=Copper, Contact Plating=Gold, Gender=Male, Height=8.85mm, Housing Material=PBT, Insulation=Insulated, Insulation Material=PBT, Lead Pitch=2.54mm, Length=33.06mm, Mount="Through Hole", NexarPartId=8917785, Number of Contacts=20, Number of Pins=20, Number of Positions=20, Number of Rows=2, Orientation=Vertical, Pitch=2.54mm, REACH SVHC=Unknown, RoHS=Compliant, Row Spacing=2.54mm, Termination="Through Hole", Voltage Rating=250V, Voltage Rating (DC)=250V, Width=33.06mm
Q8A Q8B Q8C Q8D: library part CMP-1058-00979-1, "Power MOSFET, -60 V, -2.9 A, Single P-Channel, 6-Pin TSOP, Pb-Free, Tape and Reel", Manufacturer="On Semiconductor", Package Type=TSOP-6, Channel Polarity="P Channel", Ciss Typ (pF)=942, ComponentLink1Description="Manufacturer URL", ComponentLink1URL=http://www.onsemi.com/, ComponentLink2Description=Datasheet, ComponentLink2URL=http://www.onsemi.com/pub_link/Collateral/NTGS5120P-D.PDF, ComponentLink3Description="Package Specification", ComponentLink3URL=http://www.onsemi.com/pub_link/Collateral/318G-02.PDF, Configuration=Single, Coss Typ (pF)=72, Crss Typ (pF)=48, DatasheetVersion="Rev. P0", ID Max (A)=2.9, Mounting Technology="Surface Mount", PackageDescription="6-Pin Small Outline Package, Body 3 x 1.5 mm, Pitch 0.95 mm", PackageReference=TSOP-6-318G-02, PackageVersion="Rev. V, 06/2012", Packing="Tape and Reel", PartNumber=NTGS5120PT1G, Qrr Typ (nC)=15.1, RoHS=Pb-Free, V(BR)DSS Min (V)=60, VGS Max (V)=20, VGS(th) Max (V)=3
Q12A Q12B Q12C Q12D Q15 Q16 Q17 Q18: library part CMP-14406-000015-1, "TRANS 2NPN 65V 0.1A 6TSSOP", Ambient Temperature Range High=+150°C, Ambient Temperature Range Low=-65°C, Collector Base Voltage=80V, Collector Emitter Saturation Voltage=300mV, Collector Emitter Voltage=65V, Emitter Base Voltage=6V, Manufacturer=Nexperia, Max Collector Current=100mA, Package=SOT363, Power Dissipation=300mW, Temperature="to +150°C", Unity Gain Freq=100MHz, Automotive=Yes, Automotive Grade="Grade 0", Category=Trans, ComponentLink2Description=Datasheet, ComponentLink2URL=https://assets.nexperia.com/documents/data-sheet/BC846S.pdf, Device Class L1="Discrete Semiconductors", Device Class L2=Transistors, Device Class L3=BJTs, Digikey Description="TRANS 2NPN 65V 0.1A 6TSSOP", Footprint Url=https://assets.nexperia.com/documents/outline-drawing/SOT363.pdf, Height=1.1mm, Hfe Min=110, Hfe Testic=2mA, Hfe Testvce=5V, Lead Free=Yes, Manufacturer Part Number=BC846S,115, Max Junction Temp=+150°C, Number Of Elements=2, Number Of Npn=2, Octopart=https://octopart.com/bc846s%2C115-nexperia-78739099, RoHS=TRUE, Rthja Max=416K/W, Temperature Range High=+150°C
R31A R31B R31C R31D R68 R69: library part CMP-2003-00782-1, Manufacturer=Panasonic, Part Number=ERJ8BWFR068V
R35A R35B R35C R35D R36A R36B R36C R36D R48A R48B R48C R48D R49A R49B R49C R49D R50A R50B R50C R50D R54A R54B R54C R54D: library part CMP-2002-08011-2, Case Code (Imperial)=0402, Max Operating Temperature=155°C, Max Power Dissipation=63mW, Min Operating Temperature=-55°C, Resistance=4.7kΩ, Temperature Coefficient=100ppm/°C, Tolerance=5%, Voltage Rating=50V, Case/Package=0402, Composition="Thick Film", Depth=500µm, Features="Moisture Resistant", Height=350µm, Lead Free="Lead Free", Length=1mm, Military Standard=Not, Number of Pins=2, Number of Terminations=2, Packaging="Tape & Reel", Power Rating=63mW, REACH SVHC="No SVHC", RoHS=Compliant, Schedule B="8533210045, 8533210045", Termination=SMD/SMT, Voltage Rating (AC)=50V, Voltage Rating (DC)=50V, Width=500µm
R37A R37B R37C R37D R55 R56 R57 R58 R59 R60 R64 R65 R66: library part CMP-2100-03662-2, "RES SMD 100K OHM 1% 1/10W 0603", Case Code (Imperial)=0603, Case Code (Metric)=1608, Max Operating Temperature=155°C, Max Power Dissipation=100mW, Min Operating Temperature=-55°C, Resistance=100kR, Resistance Tolerance=1%, Resistor Type="Thick Film", Temperature Coefficient=100ppm/°C, Voltage Rating=50V, Working Voltage=75V, Case/Package=0603, Construction=Rectangular, Depth=0.8mm, Features="Moisture Resistant", Height=0.45mm, Lead Free="Lead Free", Length=1.6mm, Military Standard=Not, Number of Pins=2, Number of Terminations=2, Packaging="Tape and Reel", Power Rating=100mW, REACH SVHC="No SVHC", RoHS Compliant=Yes, Series=RC, Technology="THICK FILM", Termination=SMD/SMT, Tolerance=1%, Voltage Rating (DC)=50V, Width=0.8mm
R44A R44B R44C R44D: library part CMP-1012-00717-3, "RES Thick Film, 68kΩ, 1%, 0.1W, 100ppm/°C, 0603", Case Code (Imperial)=0603, Case Code (Metric)=1608, Max Operating Temperature=155°C, Max Power Dissipation=100mW, Min Operating Temperature=-55°C, Package Quantity=10, Resistance=68kR, Temperature Coefficient=100ppm/°C, Tolerance=1%, Voltage Rating=75V, Case/Package=0603, Composition="Thick Film", Contact Plating=Tin, Depth=0.85mm, Features="Automotive AEC-Q200", Height=0.45mm, Lead Free="Lead Free", Length=1.55mm, Military Standard=Not, Mount="Surface Mount", Number of Pins=2, Number of Terminations=2, Packaging="Tape and Reel", Power Rating=100mW, Radiation Hardening=No, Termination=SMD/SMT, Voltage Rating (DC)=75V, Weight=7.1E-05oz, Width=0.033inch
R67: "Resistor", LatestRevisionDate=17-Jul-2002, LatestRevisionNote="Re-released for DXP Platform.", PackageReference=AXIAL-0.3, Published=8-Jun-2000, Publisher="Altium Limited"
U6A U6B U6C U6D: library part CMP-0063-01196-3, "42V Constant On-Time PFET Buck Switching Controller with 0.9V Reference, 8-pin eMSOP, Pb-Free", Manufacturer="Texas Instruments", PackageTopMarking=ZXTT*SVYA, PowerWise=N, Code_JEDEC=MO-187-AA, ComponentLink1Description="Datasheet URL", ComponentLink1URL=http://www.ti.com/general/docs/lit/getliterature.tsp?genericPartNumber=LM25085A&fileType=pdf, CompType=MiscPower, PackageDescription="Molded Mini-SO, Exposed Pad, .118 x .118 x .034in Body, 8 Lead, .0256in Pitch", PackageReference=DGN0008A, PinCount=8, RoHS=Y
U8: library part CMP-04895-000037-1, "IC OPAMP GP 4 CIRCUIT 14TSSOP", Ambient Temperature Range High=+70°C, Ambient Temperature Range Low=0°C, Input Bias Current=-0.02uA, Input Offset Voltage=3mV, Manufacturer="Texas Instruments", Max Dual Supply Voltage=16V, Max Junction Temp=+150°C, Max Supply Voltage=32V, Min Dual Supply Voltage=1.5V, Min Supply Voltage=3V, Nominal Supply Current=0.7-1.4mA, Output Current Per Channel=20mA, Package=PW0014A, Temperature="0°C to +70°C", Voltage Gain=100V/mV, Automotive=No, Category=IC, ComponentLink2Description=Datasheet, ComponentLink2URL=http://www.ti.com/lit/ds/symlink/lm324.pdf, Device Class L1="Integrated Circuits (ICs)", Device Class L2="Linear ICs", Device Class L3="Amplifiers - Op Amps", Digikey Description="IC OPAMP GP 4 CIRCUIT 14TSSOP", Gain Bandwidth=1.2MHz, Height=1.2mm, Lead Free=Yes, Manufacturer Part Number=LM324PWR, Mouser Description="OP Amp Quad General Purpose ±16 Volt/32 Volt 14-Pin TSSOP", Number Of Channels=4, Octopart=https://octopart.com/lm324pwr-texas+instruments-410375, RoHS=TRUE, Standoff Height=0.05mm, Temperature Range High=+70°C, Temperature Range Low=0°C
U9: library part CMP-0062-01639-4, "800mA Low-Dropout Linear Regulator, 4-pin SOT-223, Pb-Free", Manufacturer="Texas Instruments", PackageTopMarking=XYTT*N05A, PowerWise=N, Code_IPC=SOT223-4, Code_JEDEC=TO-261-AA, ComponentLink1Description="Datasheet URL", ComponentLink1URL=http://www.ti.com/general/docs/lit/getliterature.tsp?genericPartNumber=LM1117-N&fileType=pdf, CompType="LDO IC", High-Reliability=Y, PackageDescription="Molded SOT-223, 6.50 x 3.56 x 1.6mm Body, 4 Lead, 2.3mm Pitch", PackageReference=DCY0004A, PartNumber=LM1117MPX-3.3/NOPB, PinCount=4, RoHS=Y

## Via types
v1: diameter 0.6, hole 0.3, Top Layer to Bottom Layer, 128 vias
v2: diameter 0.6, hole 0.3, Top Layer to Bottom Layer, tented both sides, 94 vias
v3: diameter 0.6/0.6/0.6 (per signal layer), hole 0.3, Top Layer to Bottom Layer, 2 vias

## Nets (pads, with @x,y where several pads share a name; then routed paths per layer and width w, separated by ;. In a path a pad name is that pad's centre, name@x,y a point inside that pad or via, vN(x,y) a via of type N, cw(c..) or ccw(c..) an arc to the next point about the centre after c; other vN are vias at no path point)
5_PS: C67.1 R55.1 U8.4 | length 12.3
  Top Layer w0.254: v1(153.426,45.71) U8.4@155.512,45.71 ; R55.1@157.9,52.273 157.9,51.492 157.751,51.343 157.749,51.343 157.275,50.87 C67.1@157.275,50.47 157.275,50.07 158.201,49.144 158.201,48.91 v1(158.267,48.844)
  Bottom Layer w0.254: v1(153.426,45.71) 155.133,45.71 v1(158.267,48.844)
+3.3: FU2.2 IC2.6 R67.1 | length 19.8
  Top Layer w0.254: v1(155.956,60.757) 155.981,60.731 156.965,60.731 156.988,60.708 IC2.6@156.988,60.665
  Bottom Layer w0.254: v1(155.956,60.757) 155.956,62.23 156.718,62.992 159.436,62.992 160.122,63.678 160.122,72.228 v1(160.909,73.016) 163.263,73.016 163.508,72.771 v1(163.601,72.771)
+5: C76.1 D7.2 IC2.1 IC2.3 P2.1 R55.2 U9.3 | length 99.6
  Top Layer w0.254: IC2.3@157.988,65.065 158.011,65.042 158.011,64.261 158.658,63.614 ; IC2.1@158.988,65.065 158.988,63.944 158.658,63.614 ; v1(160.934,62.967) 159.305,62.967 158.658,63.614
  Top Layer w0.508: R55.2@159.6,52.273 160.637,52.273 160.934,52.571 v1(160.934,53.081) ; 178.638,72.263 178.714,72.263 178.765,72.212
  Bottom Layer w0.508: P2.1@128.168,73.533 126.485,73.533 125.527,74.491 125.527,76.886 127.025,78.384 171.679,78.384 175.7,74.363 175.7,72.263 164.973,72.263 160.934,68.224 v1(160.934,53.081) ; v1@177.317,72.219 177.331,72.232 v1@177.369,72.232
  other v1: 175.717,72.263 177.292,72.263 180.442,72.263
+42: C54A.2 C54B.2 C54C.2 C54D.2 C55A.2 C55B.2 C55C.2 C55D.2 C57A.2 C57B.2 C57C.2 C57D.2 C58A.2 C58B.2 C58C.2 C58D.2 C59A.2 C59B.2 C59C.2 C59D.2 C60A.1 C60B.1 C60C.1 C60D.1 P2.3 R31A.1 R31B.1 R31C.1 R31D.1 R36A.2 R36B.2 R36C.2 R36D.2 R44A.2 R44B.2 R44C.2 R44D.2 R48A.1 R48B.1 R48C.1 R48D.1 U6A.8 U6B.8 U6C.8 U6D.8
  other v2: 145.408,49.301 146.135,49.301 146.863,49.301 145.408,50.241 146.135,50.241 146.863,50.241 131.318,50.343 132.045,50.343 132.773,50.343 133.5,50.343 134.227,50.343 134.955,50.343 135.682,50.343 136.41,50.343 137.137,50.343 137.864,50.343 138.592,50.343 139.319,50.343 175.489,50.419 176.216,50.419 176.943,50.419 177.671,50.419 178.398,50.419 179.125,50.419 179.853,50.419 180.58,50.419 181.307,50.419 182.035,50.419 182.762,50.419 183.49,50.419 131.318,51.156 132.045,51.156 132.773,51.156 133.5,51.156 134.227,51.156 134.955,51.156 135.682,51.156 136.41,51.156 137.137,51.156 137.864,51.156 138.592,51.156 139.319,51.156 175.489,51.359 176.216,51.359 176.943,51.359 177.671,51.359 178.398,51.359 179.125,51.359 179.853,51.359 180.58,51.359 181.307,51.359 182.035,51.359 182.762,51.359 183.49,51.359 164.059,67.158 165.532,67.158 167.005,67.158 174.879,68.047 176.352,68.047 177.825,68.047 179.299,68.047 180.772,68.047 182.245,68.047 183.718,68.047 164.059,68.072 165.532,68.072 167.005,68.072 132.32,68.097 133.048,68.097 133.775,68.097 134.502,68.097 135.23,68.097 136.13,68.097 136.858,68.097 137.585,68.097 138.312,68.097 139.04,68.097 174.904,68.91 176.373,68.91 177.842,68.91 179.311,68.91 180.78,68.91 182.249,68.91 183.718,68.91 132.32,68.986 133.048,68.986 133.775,68.986 134.502,68.986 135.23,68.986 136.13,68.986 136.858,68.986 137.585,68.986 138.312,68.986 139.04,68.986
ADJA: C54A.1 R36A.1 U6A.1 | length 4.1
  Top Layer w0.254: C54A.1@127.991,65.823 128.019,65.795 128.632,65.795 128.754,65.673 R36A.1@129.54,65.673 129.59,65.673 129.713,65.55 129.713,65.221 130.425,64.509 131.233,64.509 U6A.1@131.33,64.412
ADJB: C54B.1 R36B.1 U6B.1 | length 4.5
  Top Layer w0.254: C54B.1@127.921,47.727 128.071,47.577 R36B.1@129.471,47.577 130.108,47.577 130.257,47.429 130.257,46.562 130.406,46.413 131.215,46.413 U6B.1@131.311,46.317
ADJC: C54C.1 R36C.1 U6C.1 | length 4.4
  Top Layer w0.254: C54C.1@172.061,47.727 172.211,47.577 R36C.1@173.61,47.577 174.147,47.577 174.295,47.429 174.295,46.562 174.444,46.413 175.253,46.413 U6C.1@175.349,46.317
ADJD: C54D.1 R36D.1 U6D.1 | length 4.1
  Top Layer w0.254: C54D.1@171.983,65.823 172.011,65.795 172.624,65.795 172.746,65.673 R36D.1@173.532,65.673 173.582,65.673 174.294,64.962 174.294,64.658 174.442,64.509 175.251,64.509 U6D.1@175.348,64.412
B_En_BJTA: Q12A.2 R49A.2 | length 3.7
  Top Layer w0.254: Q12A.2@127.189,62.42 128.923,62.42 129.743,61.599 R49A.2@129.743,60.794
B_En_BJTB: Q12B.2 R49B.2 | length 3.7
  Top Layer w0.254: Q12B.2@127.17,44.324 128.904,44.324 129.725,43.503 R49B.2@129.725,42.699
B_En_BJTC: Q12C.2 R49C.2 | length 3.7
  Top Layer w0.254: Q12C.2@171.208,44.324 172.942,44.324 173.763,43.503 R49C.2@173.763,42.699
B_En_BJTD: Q12D.2 R49D.2 | length 3.7
  Top Layer w0.254: Q12D.2@171.207,62.42 172.94,62.42 173.761,61.599 R49D.2@173.761,60.794
B_SS_BJTA: C66A.1 Q12A.5 Q12A.6 R48A.2 R54A.2 | length 10.4
  Top Layer w0.254: R54A.2@123.952,61.623 123.976,61.647 125.366,61.647 Q12A.6@125.389,61.67 ; R48A.2@124.384,65.673 124.384,64.538 124.863,64.059 125.806,64.059 126.23,63.635 126.23,62.852 125.871,62.493 125.462,62.493 Q12A.5@125.389,62.42 Q12A.6@125.389,61.67 ; C66A.1@124.84,58.889 124.84,60.344 125.389,60.893 Q12A.6@125.389,61.67
B_SS_BJTB: C66B.1 Q12B.5 Q12B.6 R48B.2 R54B.2 | length 9.6
  Top Layer w0.254: R54B.2@123.933,43.527 123.957,43.551 125.347,43.551 Q12B.6@125.37,43.574 ; R48B.2@124.308,47.406 124.308,47.168 126.106,45.369 126.106,44.651 125.853,44.397 125.443,44.397 Q12B.5@125.37,44.324 Q12B.6@125.37,43.574 ; C66B.1@124.821,40.794 124.821,42.248 125.37,42.797 Q12B.6@125.37,43.574
B_SS_BJTC: C66C.1 Q12C.5 Q12C.6 R48C.2 R54C.2 | length 9.7
  Top Layer w0.254: R54C.2@167.972,43.527 168.095,43.65 168.267,43.65 168.293,43.677 169.306,43.677 Q12C.6@169.408,43.574 169.385,43.551 169.385,42.923 168.836,42.374 168.836,40.817 C66C.1@168.859,40.794 ; R48C.2@168.454,47.577 168.504,47.577 168.627,47.454 168.627,46.886 170.013,45.5 170.013,44.546 169.864,44.397 169.481,44.397 Q12C.5@169.408,44.324 169.408,43.621 Q12C.6@169.385,43.598